# Altium PCB PIFWRobot.PcbDoc
Units mm, origin at the board's own origin, x right, y up, seen from the top; angles counter-clockwise.
Board outline 50.42 x 31.62 mm, 2 copper layers (Top Layer, Bottom Layer); 4 components, 6 nets, 58 pads, 2 vias.
Unrouted connection lines stored in the file: 2.
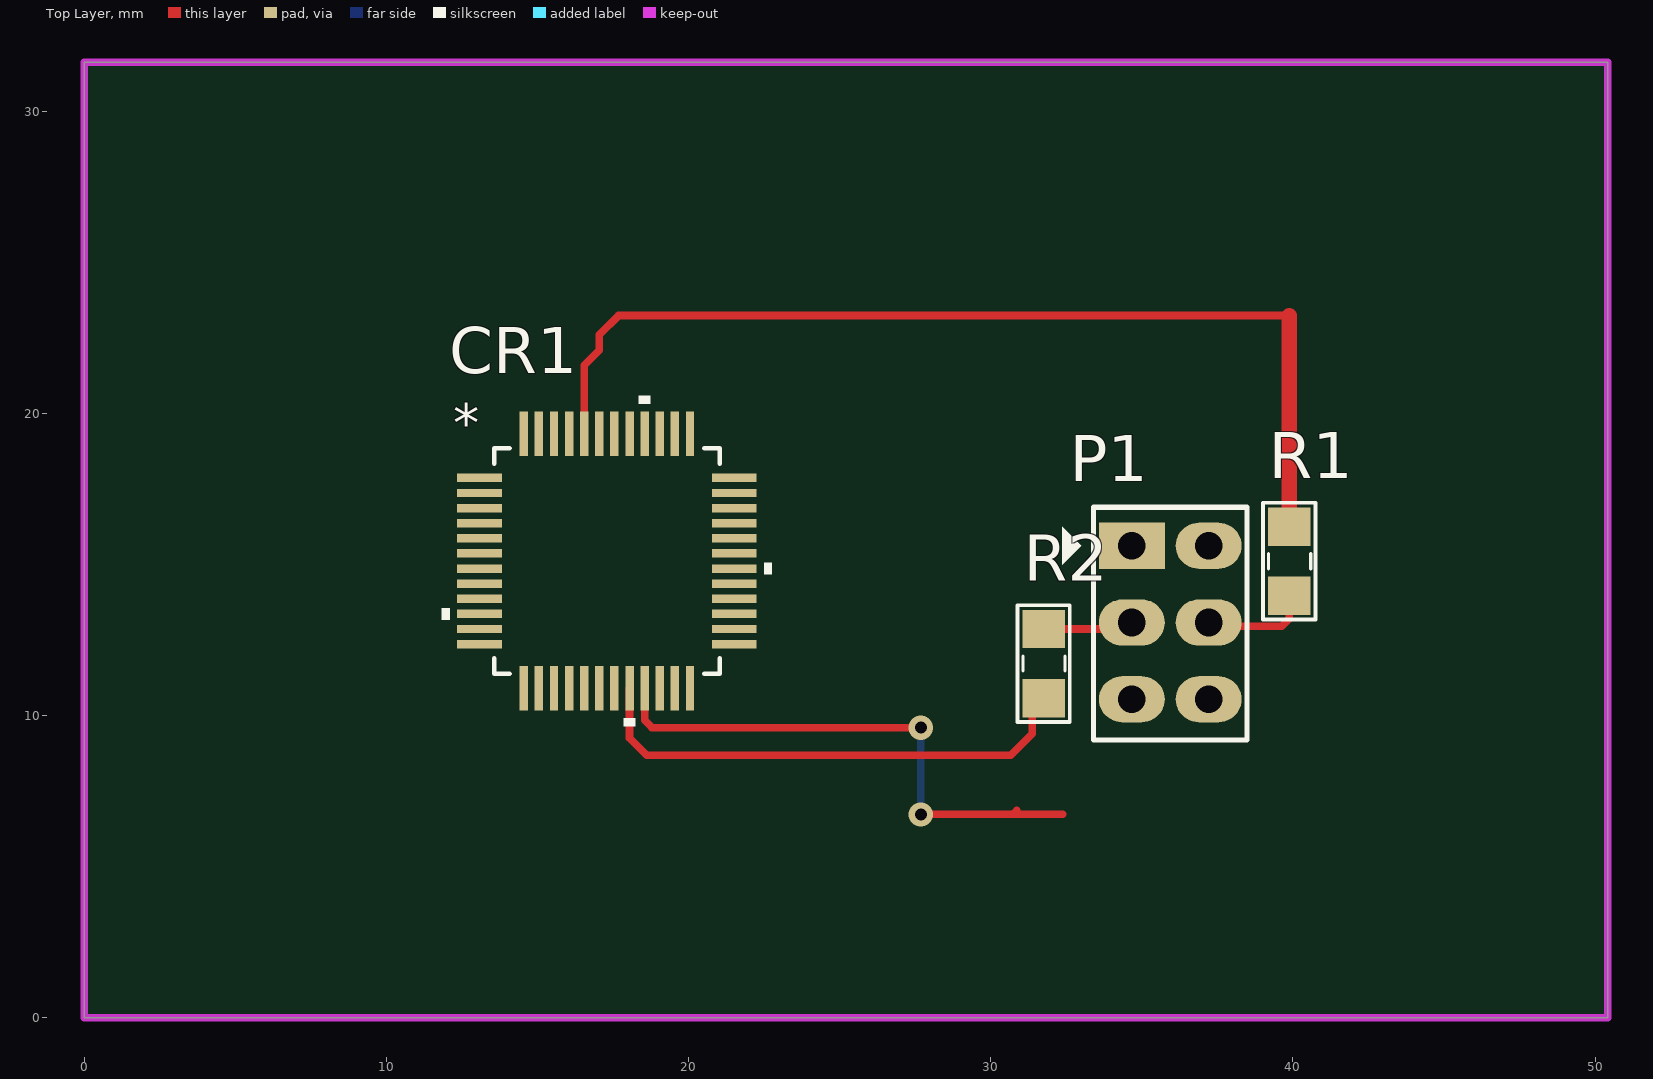
[diagram p0: Top Layer view]
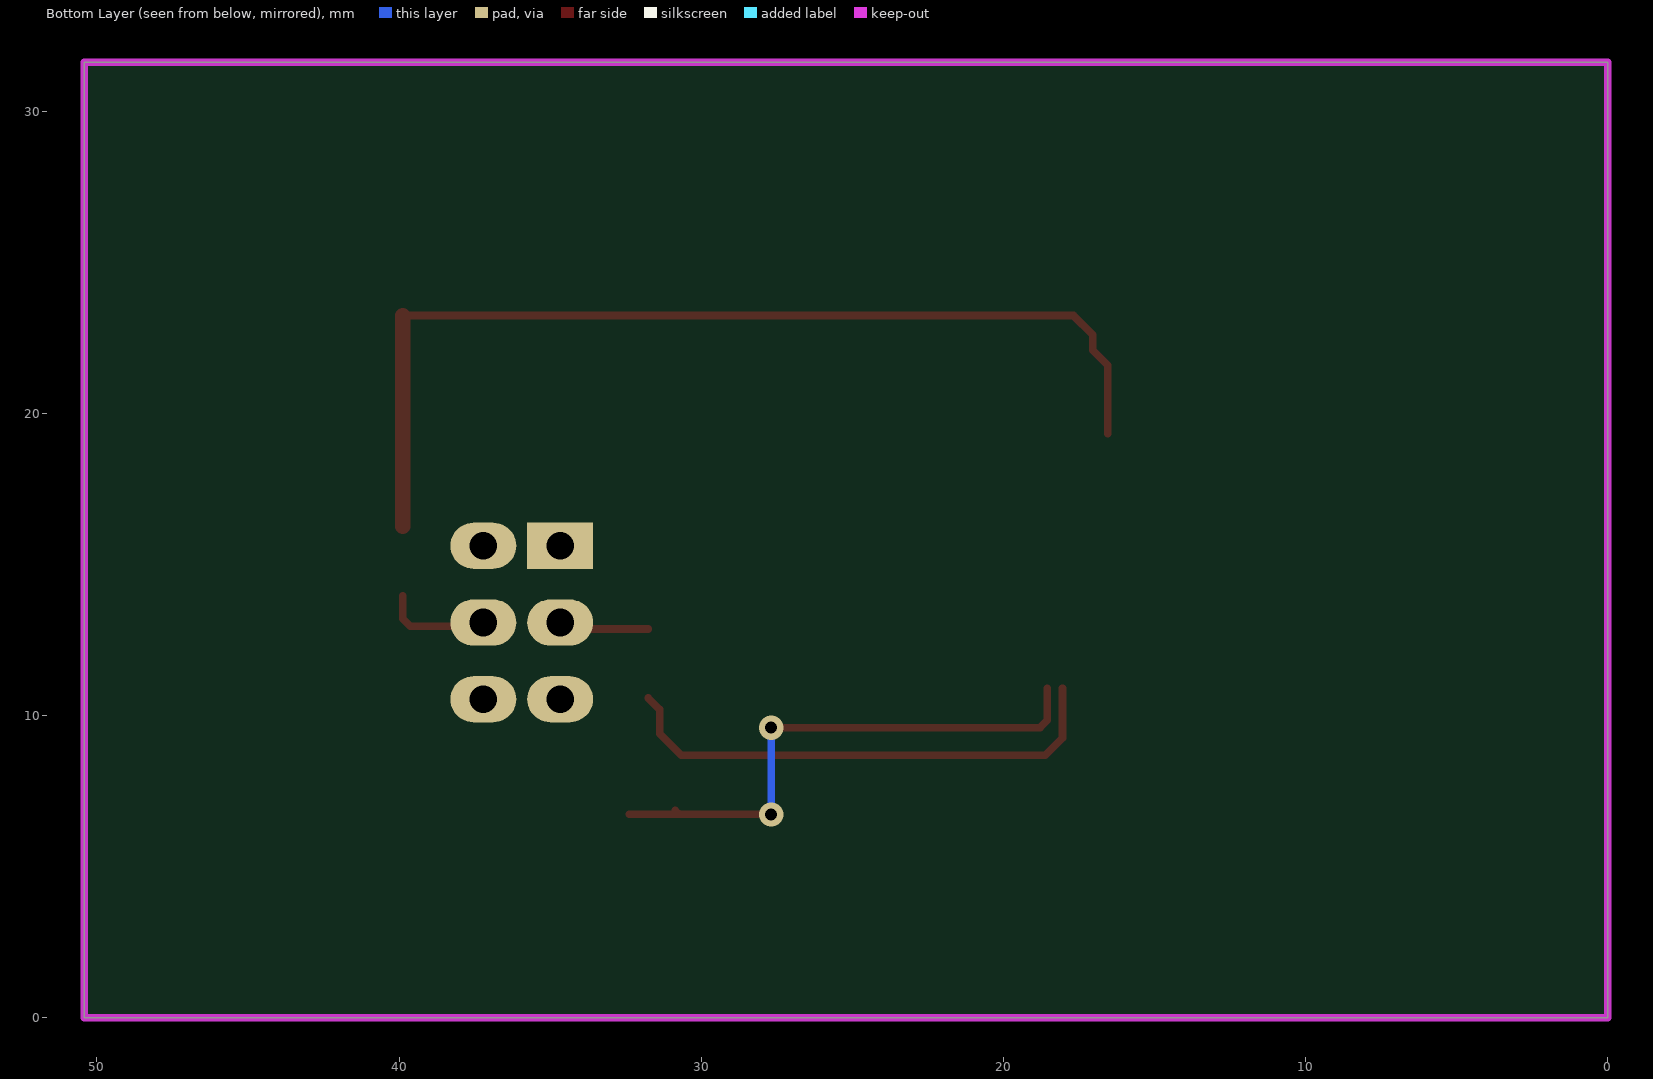
[diagram p1: Bottom Layer view, seen from below]

## Layer stack, top to bottom
Top Solder: solder mask 0.0102, Solder Resist, Dk 3.5
Top Layer: signal copper 0.0356
Dielectric 1: dielectric 0.32, FR-4, Dk 4.8
Bottom Layer: signal copper 0.0356
Bottom Solder: solder mask 0.0102, Solder Resist, Dk 3.5

## Board outline
0,0 50.419,0 50.419,31.623 0,31.623

## Design rules (kind name [scope] priority, off if disabled: settings)
Clearance [All] p1: gap=0.203 ignorepadtopadclearanceinfootprint=FALSE
PolygonConnect [All] p1: connectstyle=Relief reliefconductorwidth=0.254 reliefentries=4 polygonreliefangle="90 Angle" airgapwidth=0.254
RoutingVias [All] p1: holewidth=0.4 width=0.8 viastyle="Through Hole" minholewidth=0.4 minwidth=0.8 maxholewidth=0.4 maxwidth=0.8
SolderMaskExpansion [All] p1: expansion=0.102
Width [All] p1: maxlimit=0.508 minlimit=0.254 preferedwidth=0.381
30 further rules are at their usual default settings.

## Components (designator, comment, footprint, x,y, rotation, side; value= is the part's Value field where it differs from the comment)
CR1 "Part Number: STM32F103C8T6" LQFP-48 17.297,15.117 r0 top value=Value
P1 "Header 3X2" JP3x2 34.671,15.621 r270 top
R1 "Res-100K-0805" RES-SM-0805 39.878,16.256 r270 top value=100K
R2 "Res-100K-0805" RES-SM-0805 31.75,12.867 r270 top value=100K

## Footprints (in the part's own frame and the unit in brackets; to place one, negate y for a bottom-side part, rotate by r counter-clockwise, add the part's x,y. Pads: shape width x height; smd on the part's side, far side on the other; paste and mask are expansions set on the pad)
JP3x2 [mil] "Connector 3x2"
  rect 60x86 hole 36: 1(0,0)
  oval 60x86 hole 36: 2(0,100) 3(100,0) 4(100,100) 5(200,0) 6(200,100)
  silkscreen extent -50,-91 253,150, body extent -50,-50 250,150, height 335
LQFP-48 [mil]
  rect 58x11 smd: 1(-166,108.27) 2(-166,88.58) 3(-166,68.9) 4(-166,49.21) 5(-166,29.53) 6(-166,9.84) 7(-166,-9.84) 8(-166,-29.53) 9(-166,-49.21) 10(-166,-68.9) 11(-166,-88.58) 12(-166,-108.27) 25(166,-108.27) 26(166,-88.58) 27(166,-68.9) 28(166,-49.21) 29(166,-29.53) 30(166,-9.84) 31(166,9.84) 32(166,29.53) 33(166,49.21) 34(166,68.9) 35(166,88.58) 36(166,108.27)
  rect 11x58 smd: 13(-108.27,-166) 14(-88.58,-166) 15(-68.9,-166) 16(-49.21,-166) 17(-29.53,-166) 18(-9.84,-166) 19(9.84,-166) 20(29.53,-166) 21(49.21,-166) 22(68.9,-166) 23(88.58,-166) 24(108.27,-166) 37(108.27,166) 38(88.58,166) 39(68.9,166) 40(49.21,166) 41(29.53,166) 42(9.84,166) 43(-9.84,166) 44(-29.53,166) 45(-49.21,166) 46(-68.9,166) 47(-88.58,166) 48(-108.27,166)
  silkscreen extent -215,-215 215,215, body extent -181,-181 181,181, height 63
RES-SM-0805 [mil]
  rect 50x55 smd: 1(0,0) 2(90,0)
  silkscreen extent -31,-34 121,34, body extent -5,-24 95,25, height 20

## Part data
CR1: library part STM32F103C8T6, "No Description Available", Built_By=EMA_UL_Team, Copyright="Copyright (C) 2018 Accelerated Designs. All rights reserved", Manufacturer_Part_Number=STM32F103C8T6, RefDes=RefDes, Type=DEV, Vendor=STMicroelectronics
P1: "Header, 3-Pin, Dual row", LatestRevisionDate=17-Jul-2002, LatestRevisionNote="Re-released for DXP Platform.", Publisher="Altium Limited"
R1 R2: "RES 0 OHM JUMPER 0805", Manufacturer="Vishay Dale", Manufacturer Part Number=WSL080500000ZEA9, Supplier 1 Part Number=541-3928-1-ND, Local Supplier=thegioiic, Local Supplier Link=https://thegioiic.com/products/dien-tro-0-ohm-0805-5, Supplier 1=Digikey, Supplier 1 Link=https://www.digikey.com/product-detail/en/vishay-dale/WSL080500000ZEA9/541-3928-1-ND/7423223

## Via types
v1: diameter 0.8, hole 0.4, Top Layer to Bottom Layer, 2 vias

## Nets (pads, with @x,y where several pads share a name; then routed paths per layer and width w, separated by ;. In a path a pad name is that pad's centre, name@x,y a point inside that pad or via, vN(x,y) a via of type N, cw(c..) or ccw(c..) an arc to the next point about the centre after c; other vN are vias at no path point)
3V3: P1.1 P1.2
BOOT0: P1.4 R1.2 | length 3.6
  Top Layer w0.254: P1.4 37.338,12.954 39.624,12.954 39.878,13.208 R1.2
BOOT1: P1.3 R2.1 | length 3
  Top Layer w0.254: R2.1 34.457,12.867 P1.3
GND: P1.5 P1.6
NetCR1_20: CR1.20 R2.2 | length 16.8
  Top Layer w0.254: CR1.20 18.047,9.258 18.618,8.687 30.658,8.687 31.369,9.398 31.369,10.2 R2.2
NetCR1_44: CR1.44 R1.1 | length 33.6
  Top Layer w0.254: CR1.44 16.547,21.59 17.047,22.09 17.047,22.606 17.682,23.241 39.878,23.241
  Top Layer w0.508: R1.1 39.878,23.241
pads on no net: CR1.1 CR1.2 CR1.3 CR1.4 CR1.5 CR1.6 CR1.7 CR1.8 CR1.9 CR1.10 CR1.11 CR1.12 CR1.13 CR1.14 CR1.15 CR1.16 CR1.17 CR1.18 CR1.19 CR1.21 CR1.22 CR1.23 CR1.24 CR1.25 CR1.26 CR1.27 CR1.28 CR1.29 CR1.30 CR1.31 CR1.32 CR1.33 CR1.34 CR1.35 CR1.36 CR1.37 CR1.38 CR1.39 CR1.40 CR1.41 CR1.42 CR1.43 CR1.45 CR1.46 CR1.47 CR1.48
copper on no net: | length 26.6
  Top Layer w0.254: 18.547,10.901 18.547,9.845 18.791,9.601 19.547,9.601 27.635,9.601 v1@27.686,9.652 ; 30.861,6.858 30.734,6.731 v1(27.686,6.731) 32.385,6.731 ; 26.416,9.601 v1(27.686,9.601) 26.416,9.601
  Bottom Layer w0.254: v1(27.686,9.601) v1(27.686,6.731) v1@27.686,9.652

## Keep-outs
Keep-Out Layer:
  the board outline again, w0.254

## Text inside footprints (layer, text, board x,y; h text height)
CR1: Top Overlay "*" at 12.217,19.054 h1.27